# Altium PCB Sinusoidal Signal Generator.PcbDoc
Units mm, origin at the board's own origin, x right, y up, seen from the top; angles counter-clockwise.
Board outline 59.56 x 78.23 mm, 2 copper layers (Top Layer, Bottom Layer); 72 components, 73 nets, 221 pads, 14 vias.
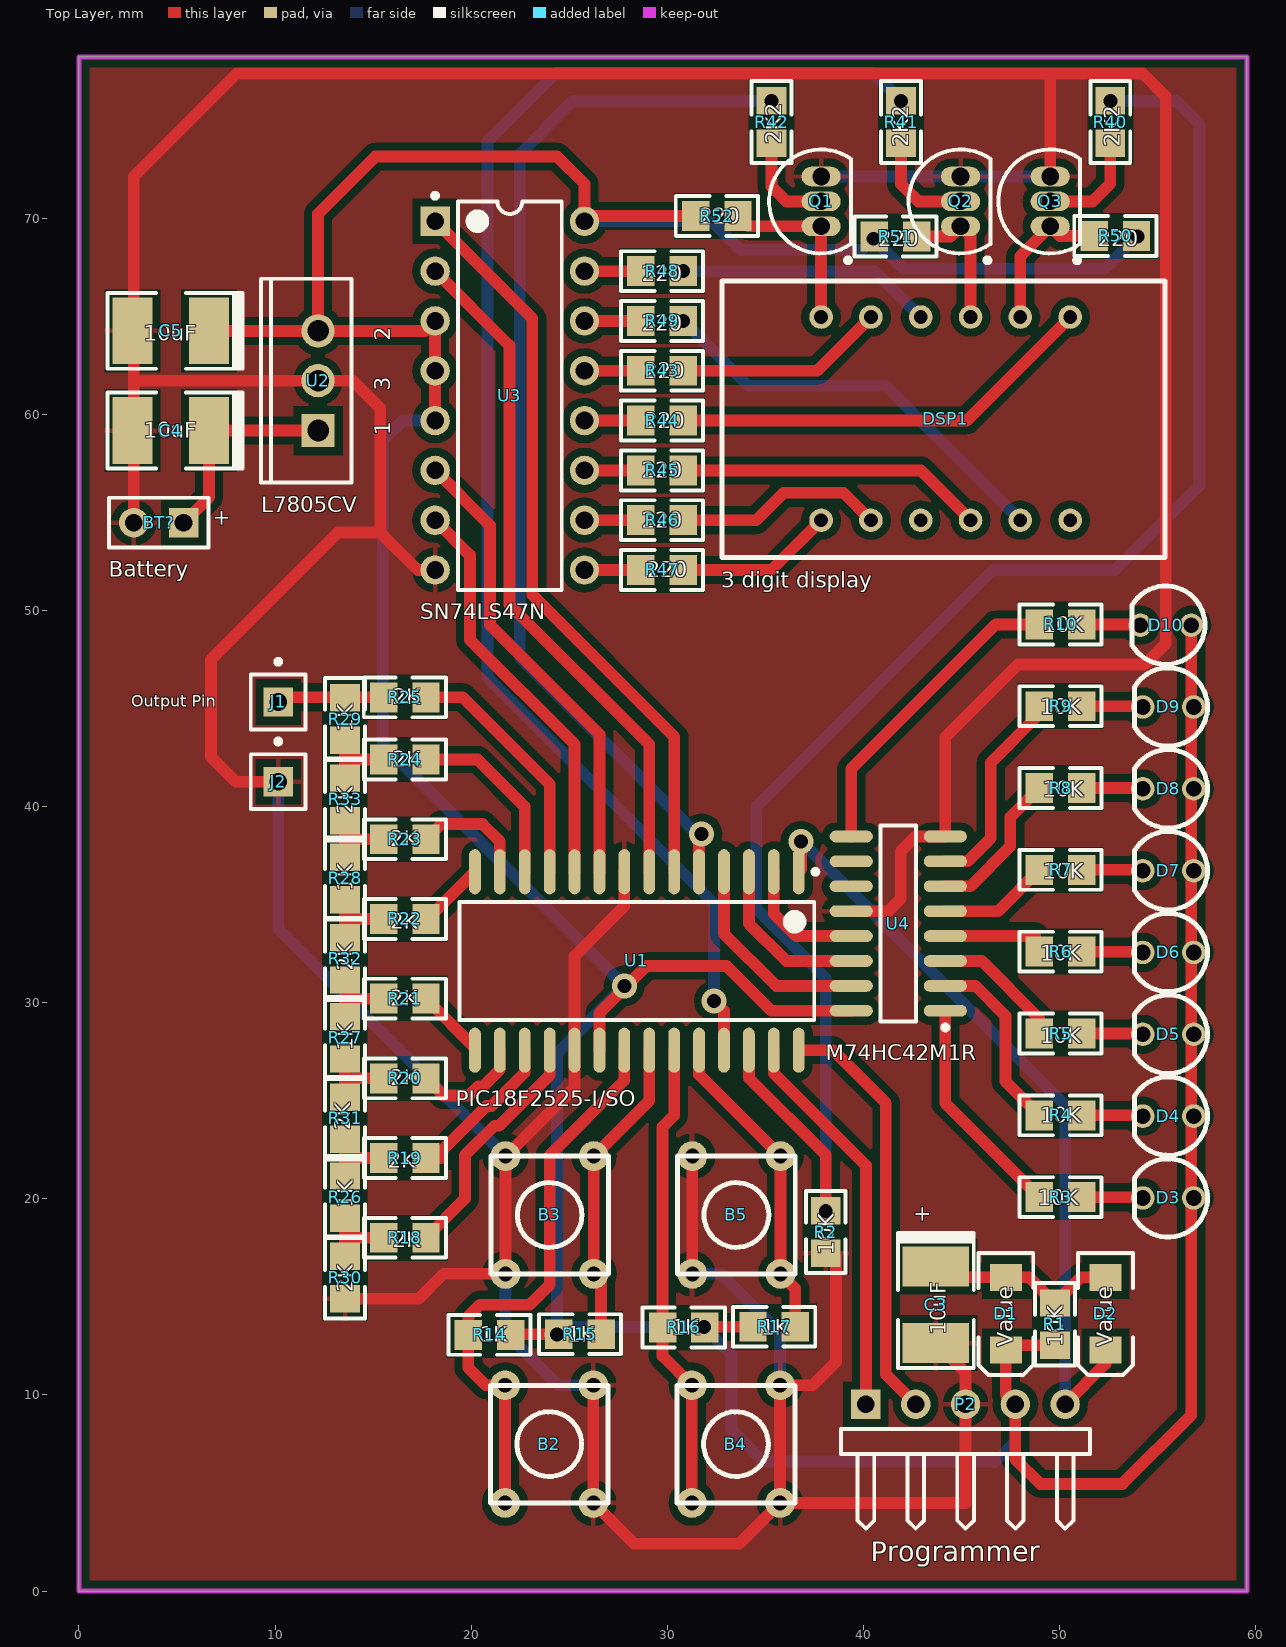
[diagram p0: Top Layer view]
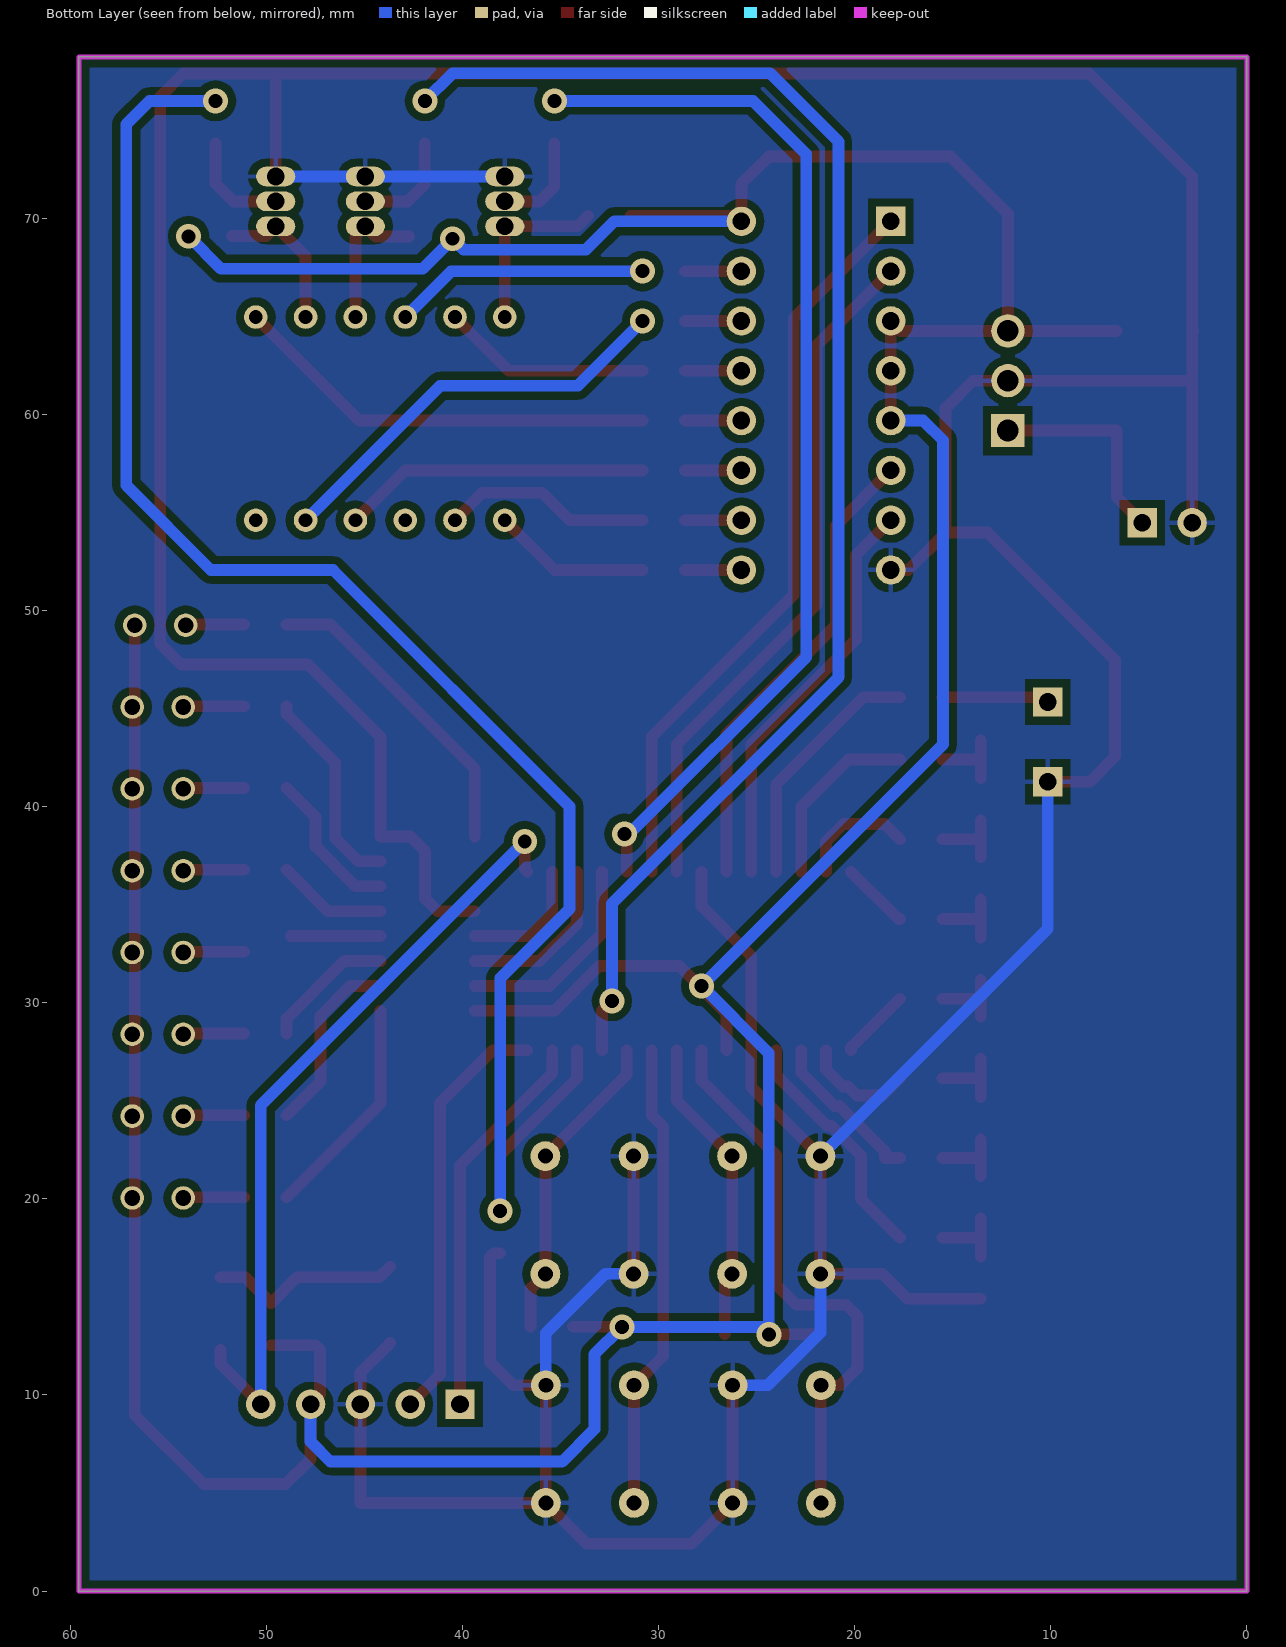
[diagram p1: Bottom Layer view, seen from below]
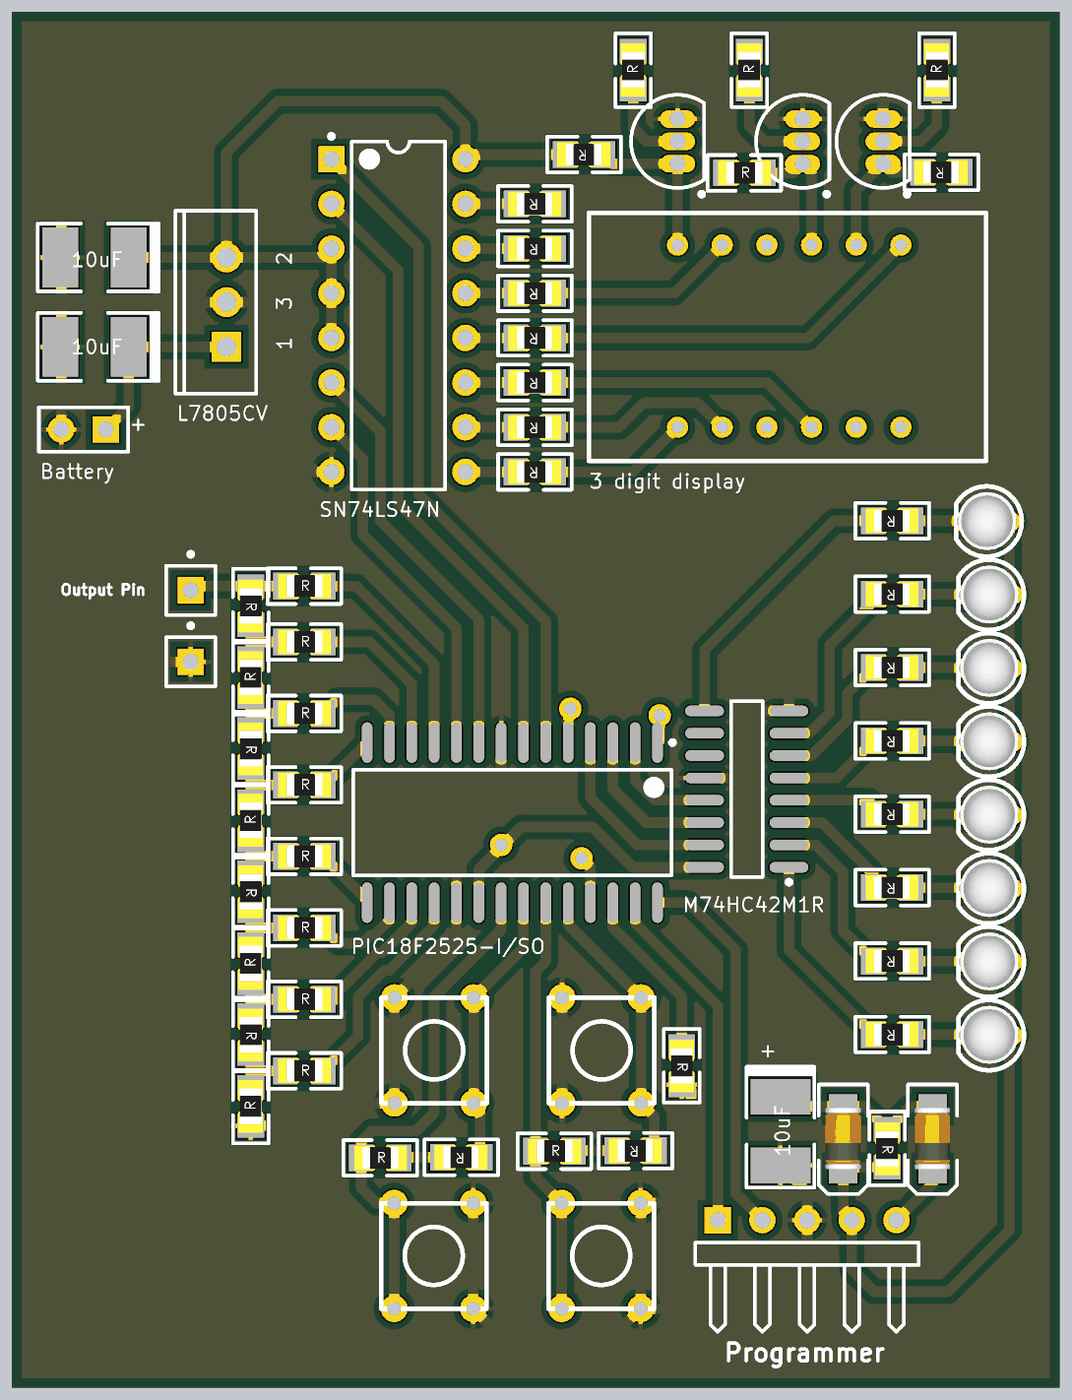
[diagram p2: 3D render of the assembled board from above, using the file's embedded part models]

## Layer stack, top to bottom
Top Solder: solder mask 0.0102, Solder Resist, Dk 3.5
Top Layer: signal copper 0.0356
Dielectric1: dielectric 0.32, FR-4, Dk 4.8
Bottom Layer: signal copper 0.0356
Bottom Solder: solder mask 0.0102, Solder Resist, Dk 3.5

## Board outline
0,0 59.563,0 59.563,78.232 0,78.232

## Design rules (kind name [scope] priority, off if disabled: settings)
Clearance [All] p1 off: gap=0.4 ignorepadtopadclearanceinfootprint=FALSE except(0: Arc-Hole Track-Hole SMDPad-Hole THPad-Hole Via-Hole Fill-Hole Poly-Hole Region-Hole Text-Hole)
ComponentClearance [All] p1 off: gap=0.254 collisioncheckmode=3 verticalgap=0.254 showdistances=FALSE
Height [All] p1 off: minheight=0 maxheight=25.4 prefheight=12.7
PolygonConnect [All] p1: connectstyle=Relief reliefconductorwidth=0.254 reliefentries=4 polygonreliefangle="90 Angle" airgapwidth=0.254
RoutingVias [All] p1: holewidth=0.711 width=1.27 viastyle="Through Hole" minholewidth=0.711 minwidth=1.27 maxholewidth=0.711 maxwidth=1.27
SilkToSolderMaskClearance SilkscreenOverComponentPads [IsPad] p1: minsilkscreentomaskgap=0.254 clearancetoexposedcopper=TRUE
SolderMaskExpansion [All] p1: expansion=0.102
Width [All] p1: maxlimit=0.6 minlimit=0.6 preferedwidth=0.6
27 further rules are at their usual default settings.

## Components (designator, comment, footprint, x,y, rotation, side; value= is the part's Value field where it differs from the comment)
B2 "Yukarı" "Kucuk Buton Ucgen" 23.98,7.493 r180 top
B3 "Yukarı" "Kucuk Buton Ucgen" 24.003,19.177 r0 top
B4 "Yukarı" "Kucuk Buton Ucgen" 33.505,7.493 r180 top
B5 "Yukarı" "Kucuk Buton Ucgen" 33.528,19.177 r0 top
BT? "Battery" BAT-2 4.064,54.483 r180 top
C3 "10uF" "1812LF -W" 43.688,14.605 r270 top
C4 "10uF" "1812LF -W" 4.699,59.194 r180 top
C5 "10uF" "1812LF -W" 4.699,64.274 r180 top
D1 "Value" Mll32 47.244,14.097 r90 top
D2 "Value" Mll32 52.324,14.097 r90 top
D3 "LED0" "Led 4mm Sari" 55.499,20.066 r90 top
D4 "LED0" "Led 4mm Sari" 55.499,24.239 r90 top
D5 "LED0" "Led 4mm Sari" 55.499,28.412 r90 top
D6 "LED0" "Led 4mm Sari" 55.499,32.585 r90 top
D7 "LED0" "Led 4mm Sari" 55.499,36.757 r90 top
D8 "LED0" "Led 4mm Sari" 55.499,40.93 r90 top
D9 "LED0" "Led 4mm Sari" 55.499,45.103 r90 top
D10 "LED0" "Led 4mm Sari" 55.372,49.276 r90 top
DSP1 "3 digit display" "3 digit" 37.846,54.61 r0 top
J1 "Socket" PIN1 10.16,45.339 r0 top
J2 "Socket" PIN1 10.16,41.275 r0 top
P2 "Value" HDR1X5H 40.132,9.525 r0 top
Q1 "NPN" BCY-W3 37.846,70.866 r0 top
Q2 "NPN" BCY-W3 44.958,70.866 r0 top
Q3 "NPN" BCY-W3 49.53,70.866 r0 top
R1 "10K" "0805 - res" 49.784,13.589 r270 top
R2 "10K" "0805 - res" 38.1,18.288 r270 top
R3 "10K" "0805 - res" 50.038,20.07 r180 top
R4 "10K" "0805 - res" 50.038,24.243 r180 top
R5 "10K" "0805 - res" 50.038,28.415 r180 top
R6 "10K" "0805 - res" 50.038,32.588 r180 top
R7 "10K" "0805 - res" 50.038,36.761 r180 top
R8 "10K" "0805 - res" 50.038,40.934 r180 top
R9 "10K" "0805 - res" 50.038,45.107 r180 top
R10 "10K" "0805 - res" 50.038,49.28 r180 top
R14 "1K" "0805 - res" 20.955,13.081 r0 top
R15 "1K" "0805 - res" 25.527,13.081 r180 top
R16 "1K" "0805 - res" 30.861,13.462 r0 top
R17 "1K" "0805 - res" 35.433,13.462 r180 top
R18 "2K" "0805 - res" 16.637,18.034 r0 top
R19 "2K" "0805 - res" 16.637,22.098 r0 top
R20 "2K" "0805 - res" 16.637,26.162 r0 top
R21 "2K" "0805 - res" 16.637,30.226 r0 top
R22 "2K" "0805 - res" 16.637,34.29 r0 top
R23 "2K" "0805 - res" 16.637,38.354 r0 top
R24 "2K" "0805 - res" 16.637,42.418 r0 top
R25 "2K" "0805 - res" 16.637,45.593 r0 top
R26 "1K" "0805 - res" 13.589,20.066 r270 top
R27 "1K" "0805 - res" 13.589,28.194 r270 top
R28 "1K" "0805 - res" 13.589,36.322 r270 top
R29 "1K" "0805 - res" 13.589,44.45 r270 top
R30 "2K" "0805 - res" 13.556,16.002 r90 top
R31 "2K" "0805 - res" 13.556,24.13 r90 top
R32 "2K" "0805 - res" 13.556,32.258 r90 top
R33 "2K" "0805 - res" 13.556,40.386 r90 top
R40 "2K2" "0805 - res" 52.578,74.93 r90 top
R41 "2K2" "0805 - res" 41.91,74.93 r90 top
R42 "2K2" "0805 - res" 35.306,74.93 r90 top
R43 "220" "0805 - res" 29.718,62.214 r180 top
R44 "220" "0805 - res" 29.718,59.674 r180 top
R45 "220" "0805 - res" 29.718,57.134 r180 top
R46 "220" "0805 - res" 29.718,54.594 r180 top
R47 "220" "0805 - res" 29.718,52.054 r180 top
R48 "220" "0805 - res" 29.718,67.294 r180 top
R49 "220" "0805 - res" 29.718,64.754 r180 top
R50 "220" "0805 - res" 52.832,69.088 r180 top
R51 "220" "0805 - res" 41.656,69.088 r0 top
R52 "220" "0805 - res" 32.512,70.104 r180 top
U1 "PIC18F2525-I/SO" SOIC-SO28_N 28.448,32.131 r270 top
U2 "L7805CV" TO220ABN 12.192,61.722 r90 top
U3 "SN74LS47N" N016 21.971,60.96 r0 top
U4 "M74HC42M1R" SO16_N 41.783,34.036 r180 top

## Footprints (in the part's own frame and the unit in brackets; to place one, negate y for a bottom-side part, rotate by r counter-clockwise, add the part's x,y. Pads: shape width x height; smd on the part's side, far side on the other; paste and mask are expansions set on the pad)
"3 digit" [mm]
  round 1.2 hole 0.7: 1(0,0) 2(2.54,0) 3(5.08,0) 4(7.62,0) 5(10.16,0) 6(12.7,0) 7(12.7,10.36) 8(10.16,10.36) 9(7.62,10.36) 10(5.08,10.36) 11(2.54,10.36) 12(0,10.36)
  silkscreen extent -5.05,-1.91 17.55,12.19
"0805 - res" [mil]
  rect 55x60 smd: 1(-43.22,-0.64) 2(41.78,-0.64)
  silkscreen extent -83,-41 82,39, body extent -59,-28 59,27, height 21
"1812LF -W" [mm]
  rect 2.032x3.4 smd: 1(-1.937,0.012) 2(1.963,0.012)
  silkscreen extent -3.65,-1.92 3.24,1.94
BAT-2 [mm] "Multicell Battery; 2 Leads"
  rect 1.5x1.5 hole 0.9: 1(-1.27,0)
  round 1.5 hole 0.9: 2(1.27,0)
  silkscreen extent -2.54,-1.27 2.54,1.27
BCY-W3 [mm] "TO, Flat Index; 3 In-Line, Axial Leads; Body Dia. 4.8mm; Leads 0.55 x 0.51 mm (max)"
  oval 2x1 hole 0.9: 1(0,-1.27) 2(0,0) 3(0,1.27)
  silkscreen extent -2.65,-3.13 1.52,2.65, body extent -2.65,-2.66 1.52,2.66, height 5.33
HDR1X5H [mm] "Connector; Header; 5 Position; Right Angle"
  rect 1.5x1.5 hole 0.9: 1(0,0)
  round 1.5 hole 0.9: 2(2.54,0) 3(5.08,0) 4(7.62,0) 5(10.16,0)
  silkscreen extent -1.27,-6.35 11.43,-1.27
"Kucuk Buton Ucgen" [mil]
  round 60 hole 30: 1(-88.58,118.11) 1(-88.58,-118.11) 2(88.58,118.11) 2(88.58,-118.11)
  silkscreen extent -118,-118 118,118, body extent -118,-118 118,118, height 197
"Led 4mm Sari" [mm]
  round 1.2 hole 0.8: 1(-0.02,-1.35) 2(-0.02,1.25)
  silkscreen extent -2.02,-2.05 1.98,1.68, body extent -1.64,-1.73 1.64,1.57, height 8.51
Mll32 [mil]
  rect 54x64 smd: 1(74.8,-0.94) 2(-71.2,-0.94)
  silkscreen extent -121,-56 124,54, body extent -66,-40 72,39, height 79
N016 [mm] "DIP, 16-Leads, Row Spacing 7.62mm, Pitch 2.54mm, Body 19.31x6.35mm"
  rect 1.5x1.5 hole 0.9: 1(-3.81,8.89)
  round 1.5 hole 0.9: 2(-3.81,6.35) 3(-3.81,3.81) 4(-3.81,1.27) 5(-3.81,-1.27) 6(-3.81,-3.81) 7(-3.81,-6.35) 8(-3.81,-8.89) 9(3.81,-8.89) 10(3.81,-6.35) 11(3.81,-3.81) 12(3.81,-1.27) 13(3.81,1.27) 14(3.81,3.81) 15(3.81,6.35) 16(3.81,8.89)
  silkscreen extent -3.93,-9.9 2.65,10.31, body extent -3.3,-9.9 3.3,9.9, height 5.08
PIN1 [mm] "Connector; Plug"
  rect 1.5x1.5 hole 0.9: 1(0,0)
  silkscreen extent -1.4,-1.4 1.4,2.17
SO16_N [mm] "SOIC, 16-Leads, Body 9.9x3.9mm, Pitch 1.27mm, IPC Medium Density"
  oval 2.2x0.6 smd: 1(-2.4,4.445) 2(-2.4,3.175) 3(-2.4,1.905) 4(-2.4,0.635) 5(-2.4,-0.635) 6(-2.4,-1.905) 7(-2.4,-3.175) 8(-2.4,-4.445) 9(2.4,-4.445) 10(2.4,-3.175) 11(2.4,-1.905) 12(2.4,-0.635) 13(2.4,0.635) 14(2.4,1.905) 15(2.4,3.175) 16(2.4,4.445)
  silkscreen extent -2.53,-5 0.9,5.42, body extent -1.95,-4.95 1.95,4.95, height 1.75
SOIC-SO28_N [mm] "SOIC, 28-Leads, Body 17.9x7.5mm, Pitch 1.27mm, IPC Medium Density"
  oval 2.3x0.6 smd: 1(-4.55,8.255) 2(-4.55,6.985) 3(-4.55,5.715) 4(-4.55,4.445) 5(-4.55,3.175) 6(-4.55,1.905) 7(-4.55,0.635) 8(-4.55,-0.635) 9(-4.55,-1.905) 10(-4.55,-3.175) 11(-4.55,-4.445) 12(-4.55,-5.715) 13(-4.55,-6.985) 14(-4.55,-8.255) 15(4.55,-8.255) 16(4.55,-6.985) 17(4.55,-5.715) 18(4.55,-4.445) 19(4.55,-3.175) 20(4.55,-1.905) 21(4.55,-0.635) 22(4.55,0.635) 23(4.55,1.905) 24(4.55,3.175) 25(4.55,4.445) 26(4.55,5.715) 27(4.55,6.985) 28(4.55,8.255)
  silkscreen extent -4.67,-9.05 3,9.23, body extent -3.8,-9.06 3.8,9.06, height 2.65
TO220ABN [mm] "TO, Thru-Hole, Vertical, Heatsink Mounted; 3 In-Line Leads; Pitch 2.54 mm; Pin sequence 1, 3, 2"
  rect 1.7x1.7 hole 1.1: 1(-2.54,0)
  round 1.7 hole 1.1: 2(2.54,0) 3(0,0)
  silkscreen extent -5.2,-1.7 5.2,2.9

## Part data
B2 B3 B4 B5: library part Button
BT?: "Multicell Battery"
C3 C4 C5: library part "Cap Pol1", "Polarized Capacitor (Radial)"
D1 D2: library part "Diode 1N914", "High Conductance Fast Diode"
D3 D4 D5 D6 D7 D8 D9 D10: "Typical INFRARED GaAs LED"
DSP1: library part "3digit display"
P2: library part "Header 5", "Header, 5-Pin"
Q1 Q2 Q3: "NPN Bipolar Transistor"
R1 R2 R3 R4 R5 R6 R7 R8 R9 R10 R14 R15 R16 R17 R18 R19 R20 R21 R22 R23 R24 R25 R26 R27 R28 R29 R30 R31 R32 R33 R40 R41 R42 R43 R44 R45 R46 R47 R48 R49 R50 R51 R52: library part Res2, "Resistor"
U1: "Enhanced Flash Microcontroller with 10-Bit A/D and nanoWatt Technology, 48K Flash, 28-Pin SOIC, Industrial Temperature Range"
U2: "Positive Voltage Regulator"
U3: "BCD-to-Seven-Segment Decoder/Driver"
U4: "BCD-to-Decimal Decoder"

## Via types
v1: diameter 1.27, hole 0.711, Top Layer to Bottom Layer, 14 vias

## Nets (pads, with @x,y where several pads share a name; then routed paths per layer and width w, separated by ;. In a path a pad name is that pad's centre, name@x,y a point inside that pad or via, vN(x,y) a via of type N, cw(c..) or ccw(c..) an arc to the next point about the centre after c; other vN are vias at no path point)
A: DSP1.11 R43.1 | length 10.7
  Top Layer w0.6: R43.1 37.646,62.23 DSP1.11
B: DSP1.7 R44.1 | length 21.9
  Top Layer w0.6: R44.1 45.266,59.69 DSP1.7
BUTON1: B2.2 R14.1 U1.21 | length 29.2
  Top Layer w0.6: B2.2@21.73,4.493 21.73,10.493 20.749,10.493 19.857,11.385 R14.1 19.857,14.015 20.447,14.605 22.987,14.605 24.003,15.621 24.003,22.225 27.813,26.035 U1.21
BUTON2: B3.2 R15.1 U1.22 | length 15.8
  Top Layer w0.6: R15.1 26.625,15.805 26.253,16.177 26.253,22.177 29.083,25.007 U1.22
BUTON3: B4.2 R16.1 U1.23 | length 24
  Top Layer w0.6: U1.23 30.353,24.257 29.763,23.667 R16.1 29.763,11.985 31.255,10.493 B4.2@31.255,4.493
BUTON4: B5.2 R17.1 U1.24 | length 16.1
  Top Layer w0.6: U1.24 31.623,26.332 35.778,22.177 35.778,16.177 36.531,15.424 R17.1
C: DSP1.4 R45.1 | length 15.7
  Top Layer w0.6: R45.1 42.926,57.15 DSP1.4
D: DSP1.2 R46.1 | length 10.7
  Top Layer w0.6: R46.1 34.544,54.61 35.941,56.007 38.989,56.007 DSP1.2
DP1: R42.2 U1.5 | length 54.7
  Top Layer w0.6: U1.5 31.623,38.481 v1(31.75,38.608)
  Bottom Layer w0.6: v1(31.75,38.608) 31.623,38.481 22.479,47.625 22.479,73.279 25.191,75.991 v1(35.322,75.991)
DP2: R41.2 U1.25 | length 74.5
  Top Layer w0.6: v1(32.385,30.099) 32.893,29.591 U1.25
  Bottom Layer w0.6: v1(32.385,30.099) 32.385,35.052 20.828,46.609 20.828,73.914 24.319,77.405 40.512,77.405 v1(41.926,75.991)
DP3: R2.1 R40.2 U1.26 | length 84.8
  Top Layer w0.6: U1.26 34.163,26.162 38.084,22.241 v1(38.084,19.386)
  Bottom Layer w0.6: v1(38.084,19.386) 38.084,31.258 34.544,34.798 34.544,40.005 46.609,52.07 52.832,52.07 57.15,56.388 57.15,74.803 55.962,75.991 v1(52.594,75.991)
E: DSP1.1 R47.1 | length 8.1
  Top Layer w0.6: R47.1 35.306,52.07 DSP1.1
F: DSP1.10 R48.1 | length 13.1
  Bottom Layer w0.6: v1(30.816,67.31) 40.586,67.31 DSP1.10
G: DSP1.5 R49.1 | length 21.4
  Bottom Layer w0.6: v1(30.816,64.77) 34.118,61.468 41.148,61.468 DSP1.5
GND: B2.1 B3.1 B4.1 B5.1 BT?.2 C3.2 C4.2 C5.2 J2.1 P2.3 Q1.3 Q2.3 Q3.3 R2.2 R30.1 U1.8 U1.19 U2.3 U3.8 U4.8 U4.12 | length 317.1
  Top Layer w0.6: C5.2 C5.2@2.794,64.204 ; BT?.2 2.794,61.722 ; J2.1 8.001,41.275 6.731,42.545 6.731,47.498 13.208,53.975 15.367,53.975 ; R30.1 17.317,14.904 18.59,16.177 21.753,16.177 21.753,22.177 25.273,25.697 U1.19 25.273,32.385 27.813,34.925 U1.8 ; U3.8 17.272,52.07 15.367,53.975 ; B2.1@26.23,3.996 B2.1@26.23,4.493 ; B2.1@26.23,10.493 B2.1@26.23,4.493 ; B5.1@31.278,16.177 B5.1@31.278,22.177 ; R2.2 38.399,17.227 38.608,17.018 38.608,11.684 37.417,10.493 35.755,10.493 B4.1@35.755,4.493 ; U4.12 41.275,34.671 41.91,35.306 41.91,37.719 42.672,38.481 U4.8 44.183,43.548 47.879,47.244 54.356,47.244 55.422,48.31 55.422,76.212 54.244,77.39 49.53,77.39 ; C3.2 45.212,11.131 P2.3 45.212,4.493 B4.1@35.755,4.493 ; Q3.3 49.53,77.39 ; 2.794,61.722 C5.2@2.794,64.204 ; 2.794,61.722 U2.3 13.97,61.722 15.367,60.325 15.367,53.975 ; C5.2@2.794,64.204 2.794,72.136 8.048,77.39 49.53,77.39 ; B2.1@26.23,4.493 28.31,2.413 33.675,2.413 B4.1@35.755,4.493
  Bottom Layer w0.6: J2.1 10.16,33.77 B3.1@21.753,22.177 ; B3.1@21.753,16.177 21.753,13.172 24.432,10.493 B2.1@26.23,10.493 ; B5.1@31.278,16.177 32.718,16.177 35.755,13.14 B4.1@35.755,10.493 ; Q1.3 Q2.3 Q3.3
MCLR: D2.2 P2.5 U1.1 | length 39.5
  Top Layer w0.6: U1.1 36.83,36.808 v1(36.83,38.227) ; P2.5 52.348,11.581 D2.2
  Bottom Layer w0.6: v1(36.83,38.227) 50.292,24.765 P2.5
NetBT?_1: BT?.1 C4.1 U2.1 | length 10.8
  Top Layer w0.6: BT?.1 6.636,55.785 C4.1 U2.1
NetC3_1: C3.1 D1.1 D2.1 R1.1 | length 10
  Top Layer w0.6: C3.1 44.246,15.997 48.458,15.997 R1.1 51.078,15.997 D2.1
NetD3_2: D3.2 R3.1 | length 3
  Top Layer w0.6: R3.1 D3.2@54.149,20.086
NetD4_2: D4.2 R4.1 | length 3
  Top Layer w0.6: R4.1 D4.2@54.149,24.259
NetD5_2: D5.2 R5.1 | length 3
  Top Layer w0.6: R5.1 D5.2@54.149,28.432
NetD6_2: D6.2 R6.1 | length 3
  Top Layer w0.6: R6.1 D6.2@54.149,32.605
NetD7_2: D7.2 R7.1 | length 3
  Top Layer w0.6: R7.1 D7.2@54.149,36.777
NetD8_2: D8.2 R8.1 | length 3
  Top Layer w0.6: R8.1 D8.2@54.149,40.95
NetD9_2: D9.2 R9.1 | length 3
  Top Layer w0.6: R9.1 D9.2@54.149,45.123
NetD10_2: D10.2 R10.1 | length 3
  Top Layer w0.6: R10.1 D10.2@54.149,49.296
NetDSP1_8: DSP1.8 Q3.1 R50.2 | length 7.7
  Top Layer w0.6: DSP1.8 48.006,68.072 Q3.1 50.022,69.104 R50.2
NetDSP1_9: DSP1.9 Q2.1 R51.2 | length 7.3
  Top Layer w0.6: R51.2 44.434,69.072 Q2.1 45.466,69.088 DSP1.9
NetDSP1_12: DSP1.12 Q1.1 R52.1 | length 9.1
  Top Layer w0.6: R52.1 34.134,69.596 Q1.1 DSP1.12
NetJ1_1: J1.1 R25.1 R29.1 | length 5.5
  Top Layer w0.254: J1.1 J1.1@10.398,45.577
  Top Layer w0.6: J1.1@10.398,45.577 R25.1
NetQ1_2: Q1.2 R42.1 | length 5.1
  Top Layer w0.6: R42.1 35.322,71.612 36.068,70.866 Q1.2
NetQ2_2: Q2.2 R41.1 | length 5.5
  Top Layer w0.6: R41.1 41.926,71.739 42.799,70.866 Q2.2
NetQ3_2: Q3.2 R40.1 | length 5.5
  Top Layer w0.6: Q3.2 51.689,70.866 52.594,71.771 R40.1
NetR3_2: R3.2 U4.1 | length 11.5
  Top Layer w0.6: U4.1 44.183,24.88 R3.2
NetR4_2: R4.2 U4.2 | length 9.5
  Top Layer w0.6: U4.2 45.72,30.861 47.244,29.337 47.244,25.992 R4.2
NetR5_2: R5.2 U4.3 | length 6.8
  Top Layer w0.6: U4.3 46.04,32.131 48.977,29.194 R5.2
NetR6_2: R6.2 U4.4 | length 4.6
  Top Layer w0.6: U4.4 48.757,33.401
NetR7_2: R7.2 U4.5 | length 5.7
  Top Layer w0.6: U4.5 45.854,34.671 46.87,34.671 R7.2
NetR8_2: R8.2 U4.6 | length 7.7
  Top Layer w0.6: U4.6 45.466,35.941 47.498,37.973 47.498,39.471 R8.2
NetR9_2: R9.2 U4.7 | length 10.6
  Top Layer w0.6: U4.7 45.322,37.211 46.498,38.387 46.498,42.247 48.977,44.726 R9.2
NetR10_2: R10.2 U4.9 | length 16.1
  Top Layer w0.6: U4.9 39.383,41.923 46.756,49.296 R10.2
NetR18_1: R18.1 R26.2 R30.2 | length 3.8
  Top Layer w0.6: R30.2 R26.2 ; 13.683,18.018 R18.1
NetR18_2: R18.2 U1.18 | length 12.3
  Top Layer w0.6: R18.2 19.685,20.005 19.685,22.225 21.191,23.731 21.436,23.731 24.003,26.298 U1.18
NetR19_1: R19.1 R26.1 R31.1 | length 3.8
  Top Layer w0.6: R26.1 R31.1 ; 13.589,22.082 R19.1
NetR19_2: R19.2 U1.17 | length 8.2
  Top Layer w0.6: R19.2 18.463,22.082 18.463,22.418 20.777,24.731 21.021,24.731 22.733,26.443 U1.17
NetR20_1: R20.1 R27.2 R31.2 | length 3.9
  Top Layer w0.6: R31.2 R27.2 ; 13.589,26.146 R20.1
NetR20_2: R20.2 U1.16 | length 5.7
  Top Layer w0.6: R20.2 18.571,25.273 19.905,25.273 20.363,25.731 20.607,25.731 21.463,26.587 U1.16
NetR21_1: R21.1 R27.1 R32.1 | length 3.8
  Top Layer w0.6: R27.1 R32.1 ; 13.589,30.21 R21.1
NetR21_2: R21.2 U1.15 | length 3.7
  Top Layer w0.6: R21.2 20.193,27.715 U1.15
NetR22_1: R22.1 R28.2 R32.2 | length 3.9
  Top Layer w0.6: R32.2 R28.2 ; 13.589,34.274 R22.1
NetR22_2: R22.2 U1.14 | length 3.5
  Top Layer w0.6: R22.2 17.786,34.274 U1.14
NetR23_1: R23.1 R28.1 R33.1 | length 3.8
  Top Layer w0.6: R28.1 R33.1 ; 13.589,38.338 R23.1
NetR23_2: R23.2 U1.13 | length 6
  Top Layer w0.6: R23.2 18.476,39.116 20.574,39.116 21.463,38.227 U1.13
NetR24_1: R24.1 R29.2 R33.2 | length 3.9
  Top Layer w0.6: R33.2 R29.2 ; 13.589,42.402 R24.1
NetR24_2: R24.2 U1.12 | length 9.4
  Top Layer w0.6: R24.2 20.336,42.402 22.733,40.005 U1.12
NetR25_2: R25.2 U1.11 | length 12.6
  Top Layer w0.6: R25.2 19.574,45.577 24.003,41.148 U1.11
NetR43_2: R43.2 U3.13 | length 2.9
  Top Layer w0.6: U3.13 R43.2
NetR44_2: R44.2 U3.12 | length 2.9
  Top Layer w0.6: U3.12 R44.2
NetR45_2: R45.2 U3.11 | length 2.9
  Top Layer w0.6: U3.11 R45.2
NetR46_2: R46.2 U3.10 | length 2.9
  Top Layer w0.6: U3.10 R46.2
NetR47_2: R47.2 U3.9 | length 2.9
  Top Layer w0.6: U3.9 R47.2
NetR48_2: R48.2 U3.15 | length 2.9
  Top Layer w0.6: U3.15 R48.2
NetR49_2: R49.2 U3.14 | length 2.9
  Top Layer w0.6: U3.14 R49.2
NetU1_2: U1.2 U4.13 | length 6.6
  Top Layer w0.6: U1.2 35.433,34.544 36.576,33.401 U4.13
NetU1_3: U1.3 U4.14 | length 8.7
  Top Layer w0.6: U1.3 34.163,34.036 36.068,32.131 U4.14
NetU1_4: U1.4 U4.15 | length 10.7
  Top Layer w0.6: U1.4 32.893,33.528 35.56,30.861 U4.15
NetU1_6: U1.6 U3.1 | length 38.2
  Top Layer w0.6: U3.1 23.114,64.897 23.114,50.8 30.353,43.561 U1.6
NetU1_7: U1.7 U3.2 | length 35.2
  Top Layer w0.6: U3.2 21.955,63.516 21.955,50.308 29.083,43.18 U1.7
NetU1_9: U1.9 U3.6 | length 23.9
  Top Layer w0.6: U3.6 20.955,54.356 20.955,49.276 26.543,43.688 U1.9
NetU1_10: U1.10 U3.7 | length 20.9
  Top Layer w0.6: U3.7 19.939,52.832 19.939,48.514 25.273,43.18 U1.10
PGC: P2.1 U1.27 | length 20
  Top Layer w0.6: U1.27 35.433,26.416 40.132,21.717 P2.1
PGD: P2.2 U1.28 | length 21.6
  Top Layer w0.6: U1.28 38.459,27.581 41.148,24.892 41.148,11.049 P2.2
VCC: C5.1 D1.2 D3.1 D4.1 D5.1 D6.1 D7.1 D8.1 D9.1 D10.1 P2.4 R1.2 R14.2 R15.2 R16.2 R17.2 R50.1 R51.1 R52.2 U1.20 U2.2 U3.3 U3.4 U3.5 U3.16 U4.16 | length 243.5
  Top Layer w0.6: C5.1 U2.2 ; U3.5 U3.4 U3.3 17.653,64.262 U2.2 ; R14.2 22.049,13.097 R15.2 ; U1.20 26.543,29.464 28.956,31.877 33.02,31.877 35.306,29.591 U4.16 ; R52.2 26.051,70.12 U3.16 25.781,71.755 24.384,73.152 15.113,73.152 12.192,70.231 U2.2 ; R16.2 31.955,13.478 R17.2 ; R1.2 47.508,12.528 D1.2 47.268,10.009 P2.4 47.752,6.731 49.022,5.461 53.213,5.461 56.722,8.97 D10.1
  Bottom Layer w0.6: U3.5 16.51,59.69 15.494,58.674 15.494,43.18 v1(27.813,30.861) 24.384,27.432 v1(24.384,13.081) 24.765,13.462 v1(31.877,13.462) 33.274,12.065 33.274,8.255 34.925,6.604 46.736,6.604 47.752,7.62 P2.4 ; U3.16 32.258,69.85 33.712,68.396 39.948,68.396 v1(40.513,68.961) 42.037,67.437 52.324,67.437 v1(53.975,69.088)
pads on no net: DSP1.3 DSP1.6 U4.10 U4.11

## Polygon pours and split planes (outlines as drawn)
GND on Bottom Layer "Bottom Layer-No Net" (solid, pour order 1000): 0,0 0,78.232 59.563,78.232 59.563,0 0,0
GND on Top Layer "Bottom Layer-No Net" (solid, pour order 1001): 0,0 0,78.232 59.563,78.232 59.563,0 0,0

## Keep-outs
Keep-Out Layer:
  the board outline again, w0.254

## Silkscreen, mask and mechanical layers (free items; w line width, h text height)
Top Overlay:
  text "Output Pin" at 2.667,45.085 h0.6
  text "Programmer" at 40.386,1.524 h1

## Text inside footprints (layer, text, board x,y; h text height)
BT?: Top Overlay "+" at 7.734,55.06 h0.8 r180
C3: Top Overlay "+" at 42.672,19.685 h0.8 r270
U2: Top Overlay "3" at 15.867,61.222 h0.8 r90; Top Overlay "2" at 15.867,63.762 h0.8 r90; Top Overlay "1" at 15.867,58.932 h0.8 r90